# Altium PCB pcDuino Link Board.PcbDoc
Units mil, origin at the board's own origin, x right, y up, seen from the top; angles counter-clockwise.
Board outline 3664.37 x 2696.85 mil, 2 copper layers (Top Layer, Bottom Layer); 26 components, 52 nets, 135 pads, 1 vias.
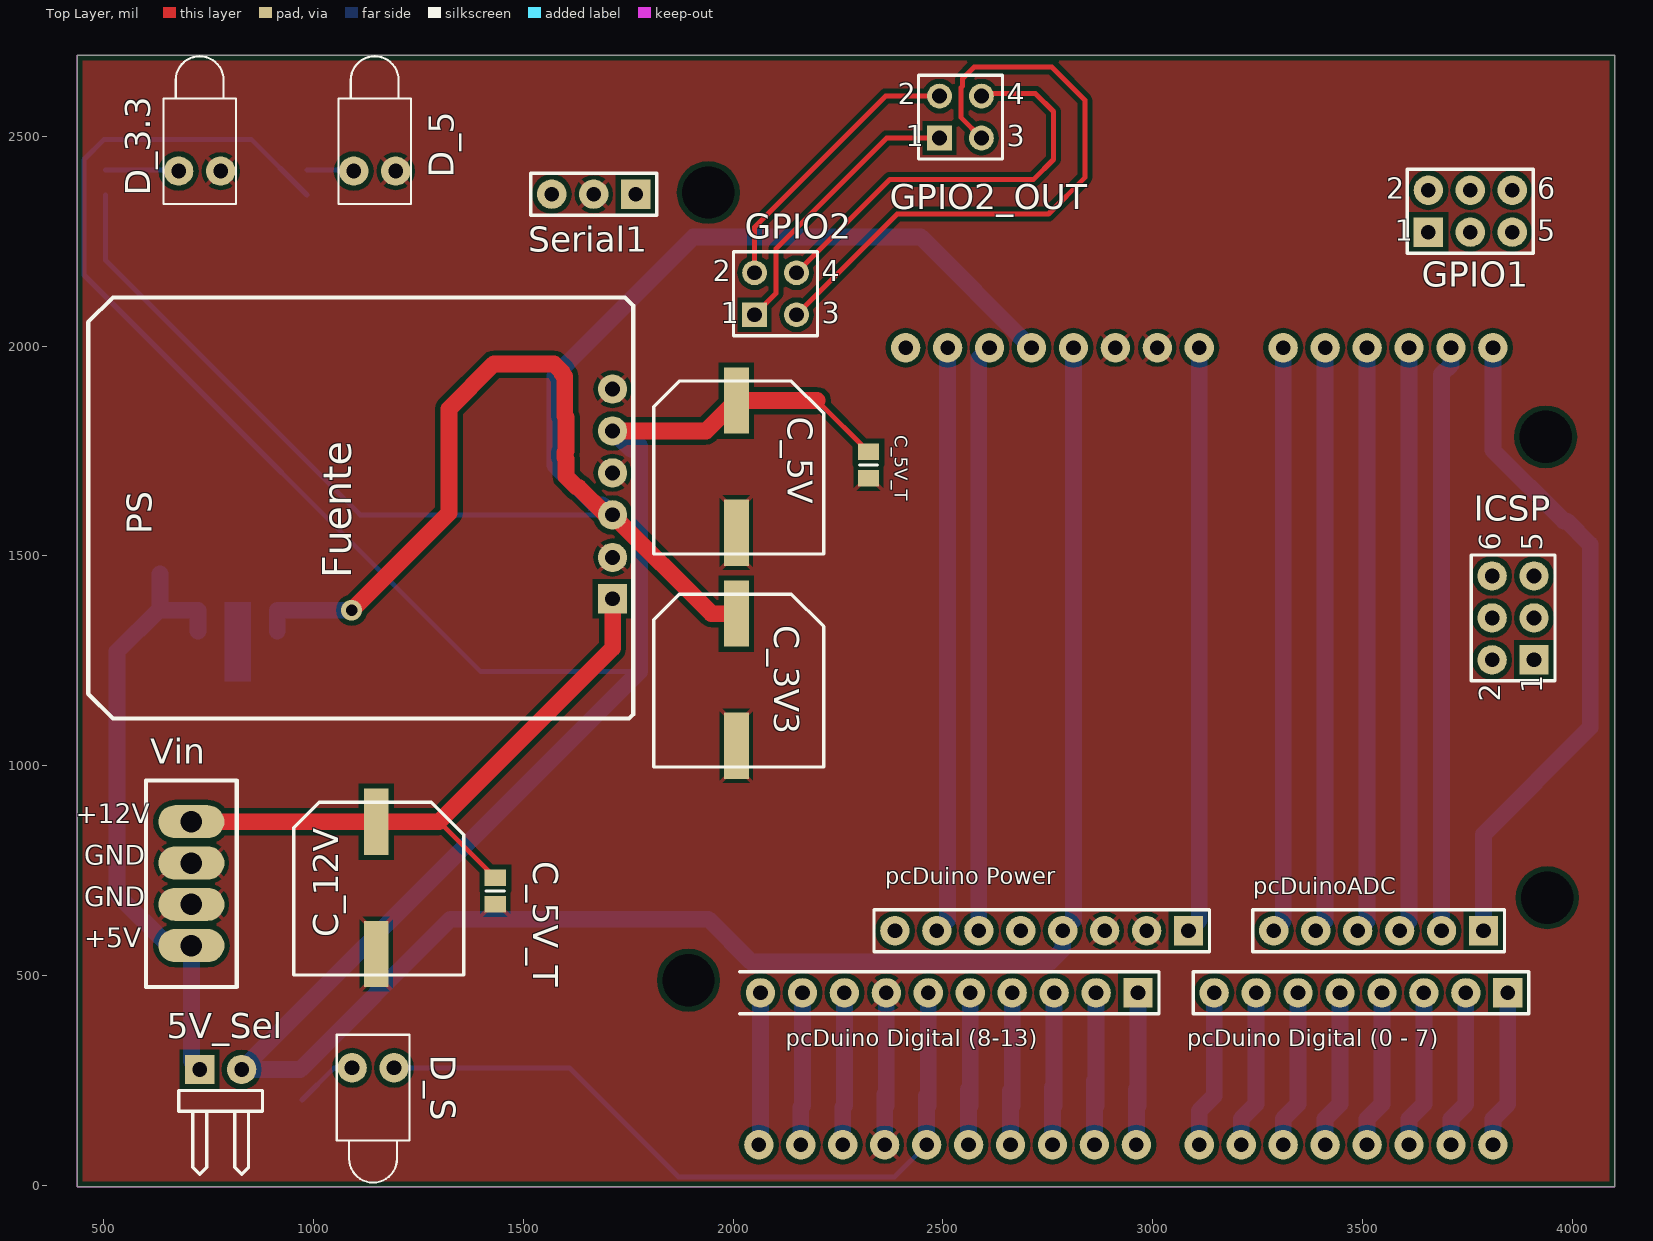
[diagram p0: Top Layer view]
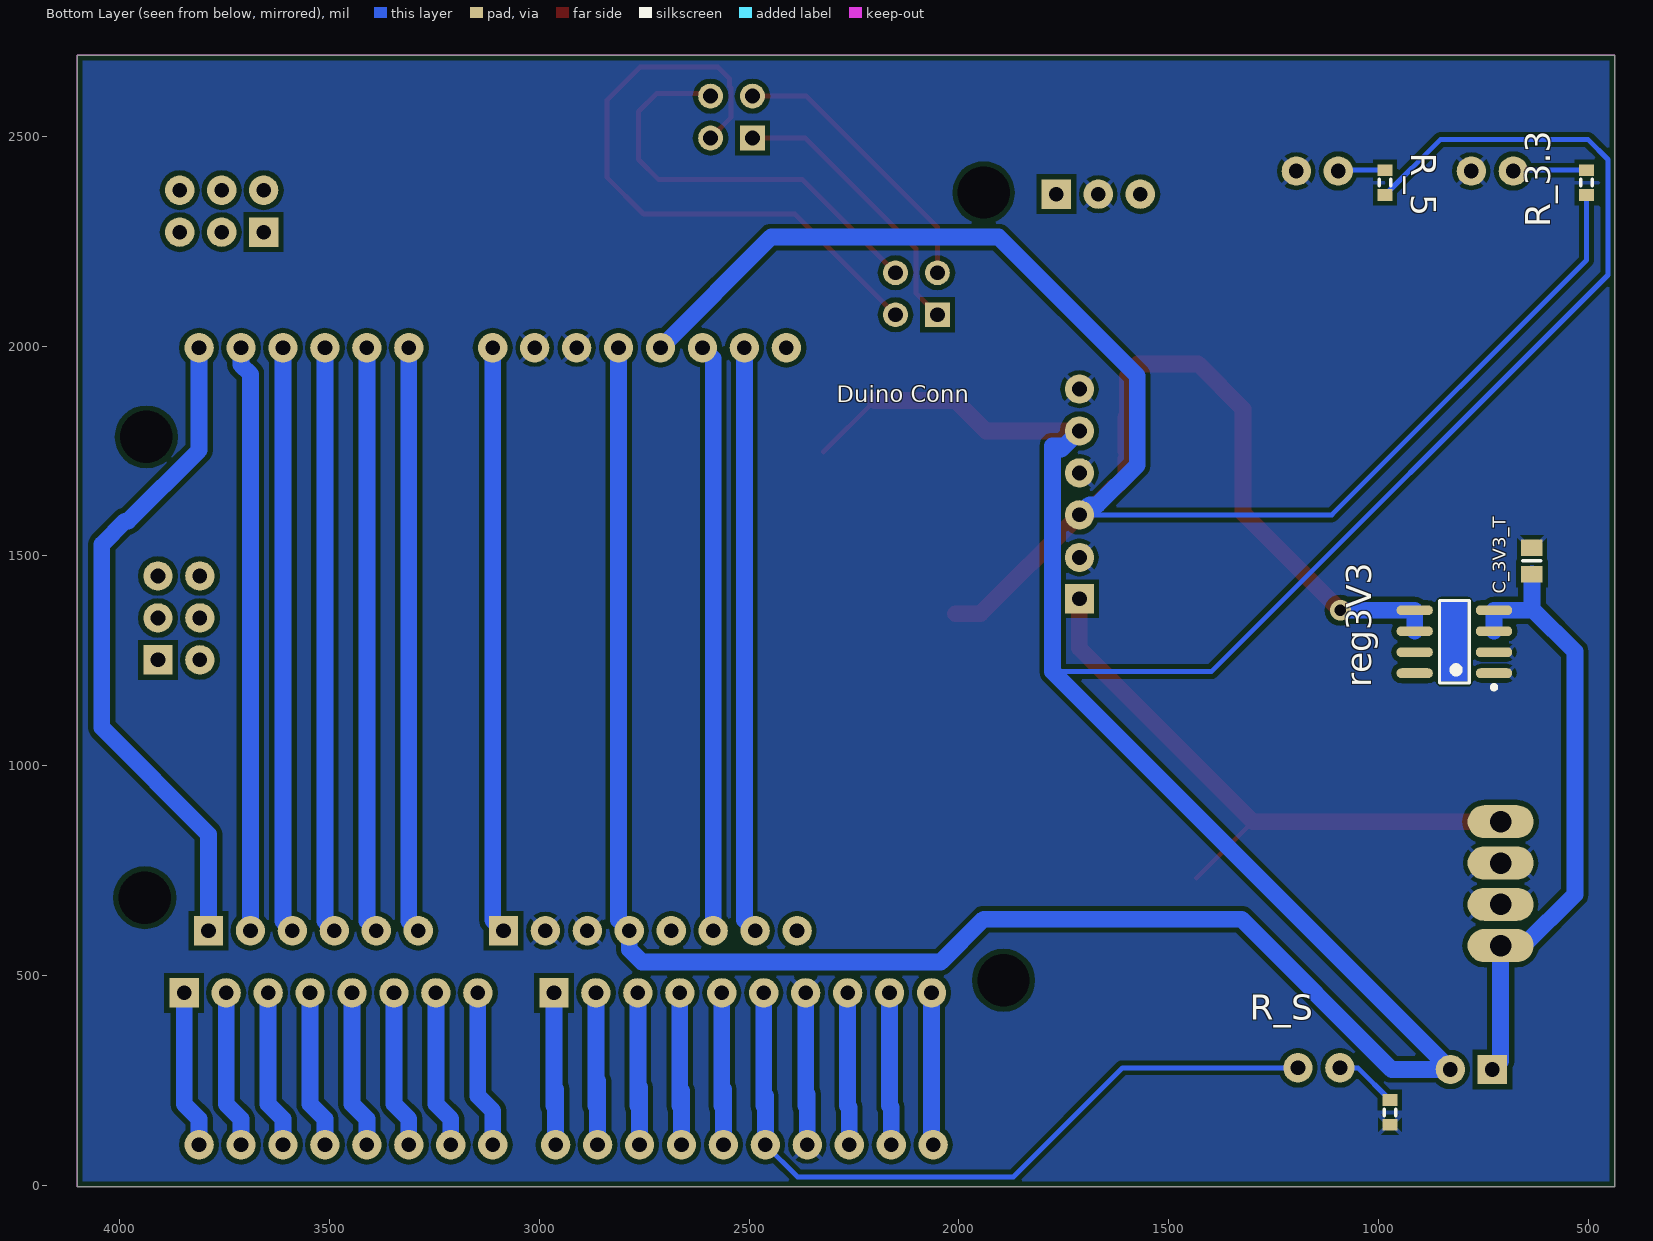
[diagram p1: Bottom Layer view, seen from below]

## Layer stack, top to bottom
Top Solder: solder mask 0.4, Solder Resist, Dk 3.5
Top Layer: signal copper 1.4
Dielectric 1: dielectric 12.6, FR-4, Dk 4.8
Bottom Layer: signal copper 1.4
Bottom Solder: solder mask 0.4, Solder Resist, Dk 3.5

## Board outline
437.01,-3.94 437.01,2692.91 4101.38,2692.91 4101.38,-3.94

## Design rules (kind name [scope] priority, off if disabled: settings)
Clearance Clearance_3 [All] p1: gap=12
ComponentClearance ComponentClearance_1 [All] p1: gap=10 collisioncheckmode=3 verticalgap=10 showdistances=FALSE
PlaneConnect [All] p1: planeconnectstyle=Relief reliefexpansion=20 reliefentries=2 reliefconductorwidth=10 reliefairgap=10
PolygonConnect [All] p1: connectstyle=Relief reliefconductorwidth=10 reliefentries=4 polygonreliefangle="45 Angle" airgapwidth=10
RoutingVias [All] p1: holewidth=28 width=50 viastyle="Through Hole" minholewidth=28 minwidth=50 maxholewidth=28 maxwidth=50
SolderMaskExpansion [All] p1: expansion=4
Width [All] p1: maxlimit=40 minlimit=10 preferedwidth=12
28 further rules are at their usual default settings.

## Classes and differential pairs
component class "pcDuino Link Board": D_S "Duino Conn" GPIO1 GPIO2 GPIO2_OUT ICSP "pcDuino Digital (0 - 7)" "pcDuino Digital (8-13)" "pcDuino Power" pcDuinoADC R_S Serial1
component class Power_In: 5V_Sel C_3V3 C_3V3_T C_5V C_5V_T C_12V D_3.3 D_5 PS R_3.3 R_5 reg3V3 Vin

## Components (designator, comment, footprint, x,y, rotation, side; value= is the part's Value field where it differs from the comment)
5V_Sel "Header 2H" HDR1X2H 728.35,275.59 r0 top
C_3V3 "Cap Pol1" "C Panasonic Size Cap Pol" 2007.87,1204.72 r270 top
C_3V3_T "Cap Pol1" 6-0805_L 633.86,1488.19 r90 bottom
C_5V "Cap Pol1" "C Panasonic Size Cap Pol" 2007.87,1712.6 r270 top
C_5V_T "Cap Pol1" 6-0805_L 1433.07,700.79 r270 top
C_5V_T "Cap Pol1" 6-0805_L 2322.83,1716.54 r270 top
C_12V "Cap Pol1" "C Panasonic Size Cap Pol" 1149.61,708.66 r270 top
D_3.3 "LED1" LED-1 728.35,2417.32 r90 top
D_5 "LED1" LED-1 1145.67,2417.32 r90 top
D_S "LED1" LED-1 1141.73,279.53 r270 top
"Duino Conn" "Shield form compatible with the Arduino Uno R3." UNO_R3_SHIELD 1661.42,-3.94 r90 bottom locked (schematic designator J?)
GPIO1 "Header 3X2" HDR2X3 3657.48,2271.65 r0 top locked
GPIO2 "Header 2X2" HDR2X2 2051.18,2074.8 r0 top
GPIO2_OUT "Header 2X2" HDR2X2 2492.13,2496.06 r0 top
ICSP "Header 3X2" HDR2X3 3909.45,1251.97 r90 top
"pcDuino Digital (0 - 7)" "Header 8" HDR1X8 3846.85,458.27 r180 top
"pcDuino Digital (8-13)" "Header 10" HDR1X10 2965.35,458.27 r180 top
"pcDuino Power" "Header 8" HDR1X8 3085.83,606.3 r180 top
pcDuinoADC "Header 6" HDR1X6 3788.98,606.3 r180 top
PS "Switching Power Source X-Sub" Fuente_Switching 1712.6,1397.64 r90 top
R_3.3 "Res" J1-0603 503.94,2389.76 r270 bottom
R_5 "Res" J1-0603 984.25,2389.76 r270 bottom
R_S "Res" J1-0603 972.44,173.23 r90 bottom
reg3V3 "TPS76833QD" TI-D8_N 818.9,1295.28 r0 bottom
Serial1 "Header 3" HDR1X3 1767.72,2362.2 r180 top
Vin "VCC_In" Vcc_In 708.66,866.14 r270 top

## Footprints (in the part's own frame and the unit in brackets; to place one, negate y for a bottom-side part, rotate by r counter-clockwise, add the part's x,y. Pads: shape width x height; smd on the part's side, far side on the other; paste and mask are expansions set on the pad)
6-0805_L [mm] "Chip Resistor, Body 2.0x1.2mm, IPC High Density"
  rect 1x1.3 smd: 1(-0.8,0) 2(0.8,0)
  silkscreen extent 0,-0.55 0,0.55, body extent -1.07,-0.7 1.07,0.7, height 0.7
"C Panasonic Size Cap Pol" [mm]
  rect 4x1.5 smd: 1(-4,0) 2(4,0)
  silkscreen extent -5.18,-5 5.28,5.28, body extent -5.09,-5.09 5.21,5.21, height 12.7
Fuente_Switching [mil]
  rect 70x70 hole 35: 1(0,0)
  round 70 hole 35: 2(98.43,0) 3(200,0) 4(300,0) 5(400,0) 6(500,0)
  silkscreen extent -285,-49 719,1250, body extent -289,-53 719,1248, height 59
HDR1X2H [mil] "Connector; Header; 2 Position; Right Angle"
  rect 70x70 hole 35: 1(0,0)
  round 70 hole 35: 2(100,0)
  silkscreen extent -50,-250 150,-50
HDR1X3 [mil] "Connector; Header; 3 Position"
  rect 70x70 hole 35: 1(0,0)
  round 70 hole 35: 2(100,0) 3(200,0)
  silkscreen extent -50,-50 250,50
HDR1X6 [mil] "Connector; Header; 6 Position"
  rect 70x70 hole 35: 1(0,0)
  round 70 hole 35: 2(100,0) 3(200,0) 4(300,0) 5(400,0) 6(500,0)
  silkscreen extent -50,-50 550,50
HDR1X8 [mil] "Connector; Header; 8 Position"
  rect 70x70 hole 35: 1(0,0)
  round 70 hole 35: 2(100,0) 3(200,0) 4(300,0) 5(400,0) 6(500,0) 7(600,0) 8(700,0)
  silkscreen extent -50,-50 750,50
HDR1X10 [mil] "Connector; Header; 10 Position"
  rect 70x70 hole 35: 1(0,0)
  round 70 hole 35: 2(100,0) 3(200,0) 4(300,0) 5(400,0) 6(500,0) 7(600,0) 8(700,0) 9(800,0) 10(900,0)
  silkscreen extent -50,-50 950,50
HDR2X2 [mm] "Connector; Header; 2x2 Position"
  rect 1.5x1.5 hole 0.9: 1(0,0)
  round 1.5 hole 0.9: 2(0,2.54) 3(2.54,0) 4(2.54,2.54)
  silkscreen extent -1.27,-1.27 3.81,3.81
HDR2X3 [mil] "Connector; Header; 3x2 Position"
  rect 70x70 hole 35: 1(0,0)
  round 70 hole 35: 2(0,100) 3(100,0) 4(100,100) 5(200,0) 6(200,100)
  silkscreen extent -50,-50 250,150
J1-0603 [mm] "Chip Resistor, Body 1.6x0.8mm, IPC High Density"
  rect 0.7x0.9 smd: 1(-0.75,0) 2(0.75,0)
  silkscreen extent -0.2,-0.35 0.2,0.35, body extent -0.85,-0.48 0.85,0.48, height 0.9
LED-1 [mil] "LED; 2 Leads"
  round 70 hole 35: 1(0,50) 2(0,-50)
  silkscreen extent -79,-87 274,87
TI-D8_N [mm] "SOIC, 8-Leads, Body 4.9x3.9mm, Pitch 1.27mm, IPC Medium Density"
  oval 2.2x0.6 smd: 1(-2.4,1.905) 2(-2.4,0.635) 3(-2.4,-0.635) 4(-2.4,-1.905) 5(2.4,-1.905) 6(2.4,-0.635) 7(2.4,0.635) 8(2.4,1.905)
  silkscreen extent -2.52,-2.5 0.9,2.88, body extent -2,-2.5 2,2.5, height 1.75
UNO_R3_SHIELD [mil]
  round 70 hole 35: 3.3V(2000,1050) 5V(2000,1150) A0(2000,1650) A1(2000,1750) A2(2000,1850) A3(2000,1950) A4(2000,2050) A5(2000,2150) AREF(100,600) D2(100,1950) D3(100,1850) D4(100,1750) D5(100,1650) D6(100,1550) D7(100,1450) D8(100,1300) D9(100,1200) D10(100,1100) D11(100,1000) D12(100,900) D13(100,800) GND@0(2000,1250) GND@1(2000,1350) GND@2(100,700) IOREF(2000,850) NC(2000,750) RES(2000,950) RX(100,2150) SCL(100,400) SDA(100,500) TX(100,2050) VIN(2000,1450)
Vcc_In [mm]
  oval 2x4 hole 1.3: 0(0,0) 1(2.5,0) 2(5,0) 3(7.5,0)
  silkscreen extent -2.5,-2.75 10,2.75

## Part data
5V_Sel: "Header, 2-Pin, Right Angle"
C_3V3 C_5V C_12V: "Polarized Capacitor (Radial)"
C_3V3_T C_5V_T C_5V_T: "Tantalum"
D_3.3 D_5 D_S: "Typical RED GaAs LED"
"Duino Conn": library part ARDUINO_R3_SHIELDNOLABELS
GPIO1 ICSP: "Header, 3-Pin, Dual row"
GPIO2 GPIO2_OUT: "Header, 2-Pin, Dual row"
"pcDuino Digital (0 - 7)" "pcDuino Power": "Header, 8-Pin"
"pcDuino Digital (8-13)": "Header, 10-Pin"
pcDuinoADC: "Header, 6-Pin"
R_3.3 R_5 R_S: library part Res3, "Resistor"
reg3V3: "Single Output Fast Transient Response LDO, 1 A, Fixed 3.3 V Output, 2.7 to 10 V Input, with Low IQ, 8-pin SOIC (D), -40 to 125 degC, Green (RoHS & no Sb/Br)"
Serial1: "Header, 3-Pin"

## Free pads (board coordinates)
  round 70 hole 125: 7(1893.7,488.19) 8(3940.94,685.04) 9(3937.01,1783.46) 10(1940.94,2366.14)

## Via types
v1: diameter 50, hole 28, Top Layer to Bottom Layer, 1 vias

## Nets (pads, with @x,y where several pads share a name; then routed paths per layer and width w, separated by ;. In a path a pad name is that pad's centre, name@x,y a point inside that pad or via, vN(x,y) a via of type N, cw(c..) or ccw(c..) an arc to the next point about the centre after c; other vN are vias at no path point)
+3.3V: "Duino Conn.3.3V" C_3V3.1 PS.3 R_3.3.2 reg3V3.5 reg3V3.6 | length 5305.1
  Top Layer w40: v1(1090.75,1370.28) 1322.83,1602.36 1322.83,1850.63 1429.27,1957.06 1573.37,1957.06 1592.12,1938.31 1592.12,1934.07 1598.96,1927.23 1598.96,1832.97 1601.96,1829.97 1601.96,1749.91 1598.96,1746.91 1598.96,1734.62 1601.96,1731.62 1601.96,1689.38 1627.95,1663.39 1631.89,1663.39 PS.3@1697.64,1597.64 ; PS.3 1948.03,1362.2 C_3V3.1
  Bottom Layer w12: R_3.3.2 503.94,2204.72 1111.02,1597.64 PS.3
  Bottom Layer w40: reg3V3.6 reg3V3.5 v1(1090.75,1370.28) ; PS.3 1688.19,1622.05 1669.29,1622.05 1574.8,1716.54 1574.8,1929.13 1905.51,2259.84 2447.64,2259.84 2711.42,1996.06
+5V: 5V_Sel.2 "Duino Conn.5V" "pcDuino Power.4" C_5V.1 C_5V_T.1@2322.83,1748.03 PS.5 R_5.2 | length 8825.3
  Top Layer w12: 2200.79,1870.08 C_5V_T.1@2322.83,1748.03
  Top Layer w40: PS.5 1935.43,1797.64 C_5V.1 2200.79,1870.08
  Bottom Layer w12: R_5.2 852.36,2492.13 500,2492.13 452.76,2444.88 452.76,2169.29 1398.2,1223.84 1776.6,1223.84
  Bottom Layer w40: PS.5 1755.91,1754.33 1755.91,1761.64 1776.6,1761.64 1776.6,1223.84 5V_Sel.2 968.22,275.59 1326.49,633.86 1940.94,633.86 2043.31,531.5 2755.91,531.5 2785.83,561.42 2785.83,606.3 ; 2811.42,631.89 2811.42,1996.06
+5V_OP: 5V_Sel.1 C_3V3_T.1 reg3V3.3 reg3V3.4 Vin.3 | length 1448.5
  Bottom Layer w25: Vin.3@653.54,570.87 Vin.3
  Bottom Layer w40: 633.86,1374.02 C_3V3_T.1 ; Vin.3@653.54,570.87 531.5,692.91 531.5,1271.65 630.12,1370.28 reg3V3.4 reg3V3.3 ; 5V_Sel.1@708.66,295.27 Vin.3
+12V: C_5V_T.1@1433.07,732.28 C_12V.1 PS.1 Vin.0 | length 1482.6
  Top Layer w12: 1299.21,866.14 C_5V_T.1@1433.07,732.28
  Top Layer w39.37: Vin.0 1299.21,866.14 1712.6,1279.53 PS.1
AD1: "Duino Conn.A5" pcDuinoADC.1 | length 1595.8
  Bottom Layer w40: pcDuinoADC.1 3788.98,836.22 4043.31,1090.55 4043.31,1527.56 3988.19,1582.68 3980.32,1582.68 3811.42,1751.57 3811.42,1996.06
AD2: "Duino Conn.A4" pcDuinoADC.2 | length 1399.1
  Bottom Layer w40: pcDuinoADC.2 3688.98,1933.07 3711.42,1955.51 3711.42,1996.06
AD3: "Duino Conn.A3" pcDuinoADC.3 | length 1399.1
  Bottom Layer w40: pcDuinoADC.3 3611.42,628.74 3611.42,1996.06
AD4: "Duino Conn.A2" pcDuinoADC.4 | length 1399.1
  Bottom Layer w40: pcDuinoADC.4 3511.42,628.74 3511.42,1996.06
AD5: "Duino Conn.A1" pcDuinoADC.5 | length 1399.1
  Bottom Layer w12: pcDuinoADC.5 pcDuinoADC.5@3411.42,628.74
  Bottom Layer w40: pcDuinoADC.5@3411.42,628.74 3411.42,1996.06
AD6: "Duino Conn.A0" pcDuinoADC.6 | length 1399.1
  Bottom Layer w40: pcDuinoADC.6 3311.42,628.74 3311.42,1996.06
GND: "Duino Conn.GND@0" "Duino Conn.GND@1" "Duino Conn.GND@2" "pcDuino Digital (8-13).7" "pcDuino Power.2" "pcDuino Power.3" C_3V3.2 C_3V3_T.2 C_5V.2 C_5V_T.2 C_12V.2 D_3.3.2 D_5.2 PS.2 PS.4 PS.6 R_S.1 reg3V3.1 reg3V3.2 Serial1.2 Vin.1 Vin.2 | length 389.8
  Bottom Layer w40: 2361.42,96.06 2361.42,216.53 ; 2365.36,188.98 2365.36,458.27
GPIO_1_1: GPIO1.1
GPIO_1_2: GPIO1.2
GPIO_1_3: GPIO1.3
GPIO_1_4: GPIO1.4
GPIO_1_5: GPIO1.5
GPIO_1_6: GPIO1.6
GPIO_2_1: GPIO2.1 GPIO2_OUT.1 | length 677.7
  Top Layer w12: GPIO2.1 2102.36,2125.98 2102.36,2232.28 2366.14,2496.06 GPIO2_OUT.1
GPIO_2_2: GPIO2.2 GPIO2_OUT.2 | length 679.1
  Top Layer w12: GPIO2.2 2051.18,2283.46 2363.78,2596.06 GPIO2_OUT.2
GPIO_2_3: GPIO2.3 GPIO2_OUT.3 | length 1506.4
  Top Layer w12: GPIO2.3 2391.34,2314.96 2751.97,2314.96 2838.58,2401.57 2838.58,2586.61 2759.84,2665.35 2574.8,2665.35 2547.24,2637.8 2547.24,2619.59 2543.76,2616.1 2543.76,2544.43 GPIO2_OUT.3
GPIO_2_4: GPIO2.4 GPIO2_OUT.4 | length 1030.8
  Top Layer w12: GPIO2.4 2374.02,2397.64 2716.54,2397.64 2763.78,2444.88 2763.78,2559.06 2720.47,2602.36 2598.43,2602.36 GPIO2_OUT.4
ICSP_1: ICSP.1
ICSP_2: ICSP.2
ICSP_3: ICSP.3
ICSP_4: ICSP.4
ICSP_5: ICSP.5
ICSP_6: ICSP.6
LED_STATUS: "Duino Conn.D13" "pcDuino Digital (8-13).6" D_S.1 | length 1794.8
  Bottom Layer w12: D_S.1 1610.24,279.53 1870.08,19.69 2385.04,19.69 2461.42,96.06
  Bottom Layer w40: 2461.42,96.06 2461.42,212.6 ; 2465.36,188.98 2465.36,458.27
NetD_3.3_1: D_3.3.1 R_3.3.1 | length 172.4
  Bottom Layer w12: R_3.3.1 D_3.3.1@676.38,2419.29
NetD_5_1: D_5.1 R_5.1 | length 109.4
  Bottom Layer w12: R_5.1 D_5.1@1093.7,2419.29
NetD_S_2: D_S.2 R_S.2 | length 151.1
  Bottom Layer w12: R_S.2 1049.21,279.53 D_S.2
"NetDuino Conn_AREF": "Duino Conn.AREF" "pcDuino Digital (8-13).8" | length 358.3
  Bottom Layer w40: 2261.42,96.06 2261.42,185.04 ; 2265.36,188.98 2265.36,458.27
"NetDuino Conn_D2": "Duino Conn.D2" "pcDuino Digital (0 - 7).3" | length 376.9
  Bottom Layer w40: 3611.42,96.06 3611.42,157.48 3646.85,192.91 3646.85,458.27
"NetDuino Conn_D3": "Duino Conn.D3" "pcDuino Digital (0 - 7).4" | length 376.9
  Bottom Layer w40: 3511.42,96.06 3511.42,157.48 3546.85,192.91 3546.85,458.27
"NetDuino Conn_D4": "Duino Conn.D4" "pcDuino Digital (0 - 7).5" | length 376.9
  Bottom Layer w40: 3411.42,96.06 3411.42,157.48 3446.85,192.91 3446.85,458.27
"NetDuino Conn_D5": "Duino Conn.D5" "pcDuino Digital (0 - 7).6" | length 376.9
  Bottom Layer w40: 3311.42,96.06 3311.42,157.48 3346.85,192.91 3346.85,458.27
"NetDuino Conn_D6": "Duino Conn.D6" "pcDuino Digital (0 - 7).7" | length 376.9
  Bottom Layer w40: 3211.42,96.06 3211.42,157.48 3246.85,192.91 3246.85,458.27
"NetDuino Conn_D7": "Duino Conn.D7" "pcDuino Digital (0 - 7).8" | length 376.9
  Bottom Layer w40: 3111.42,96.06 3111.42,177.16 3146.85,212.6 3146.85,458.27
"NetDuino Conn_D8": "Duino Conn.D8" "pcDuino Digital (8-13).1" | length 401.6
  Bottom Layer w40: 2961.42,96.06 2961.42,228.35 ; 2965.36,188.98 2965.36,458.27
"NetDuino Conn_D9": "Duino Conn.D9" "pcDuino Digital (8-13).2" | length 421.3
  Bottom Layer w40: 2861.42,96.06 2861.42,248.03 ; 2865.36,188.98 2865.36,458.27
"NetDuino Conn_D10": "Duino Conn.D10" "pcDuino Digital (8-13).3" | length 405.5
  Bottom Layer w40: 2761.42,96.06 2761.42,232.28 ; 2765.36,188.98 2765.36,458.27
"NetDuino Conn_D11": "Duino Conn.D11" "pcDuino Digital (8-13).4" | length 397.6
  Bottom Layer w40: 2661.42,96.06 2661.42,224.41 ; 2665.36,188.98 2665.36,458.27
"NetDuino Conn_D12": "Duino Conn.D12" "pcDuino Digital (8-13).5" | length 401.6
  Bottom Layer w40: 2561.42,96.06 2561.42,228.35 ; 2565.36,188.98 2565.36,458.27
"NetDuino Conn_IOREF": "Duino Conn.IOREF" "pcDuino Power.7" | length 1400.4
  Bottom Layer w40: 2485.83,606.3 2511.42,631.89 2511.42,1996.06
"NetDuino Conn_RES": "Duino Conn.RES" "pcDuino Power.6" | length 1400.4
  Bottom Layer w40: 2585.83,606.3 2585.83,1970.47 2611.42,1996.06
"NetDuino Conn_RX": "Duino Conn.RX" "pcDuino Digital (0 - 7).1" | length 376.9
  Bottom Layer w40: 3811.42,96.06 3811.42,157.48 3846.85,192.91 3846.85,458.27
"NetDuino Conn_TX": "Duino Conn.TX" "pcDuino Digital (0 - 7).2" | length 376.9
  Bottom Layer w40: 3711.42,96.06 3711.42,157.48 3746.85,192.91 3746.85,458.27
"NetDuino Conn_VIN": "Duino Conn.VIN" "pcDuino Power.1" | length 1400.4
  Bottom Layer w40: 3085.83,606.3 3111.42,631.89 3111.42,1996.06
RX: Serial1.3
SCL_PCDUINO: "Duino Conn.SCL" "pcDuino Digital (8-13).10" | length 358.3
  Bottom Layer w40: 2065.36,100 2065.36,458.27
SDA_PCDUINO: "Duino Conn.SDA" "pcDuino Digital (8-13).9" | length 358.3
  Bottom Layer w40: 2161.42,96.06 2161.42,185.04 ; 2165.36,188.98 2165.36,458.27
TX: Serial1.1
pads on no net: "Duino Conn.NC" "pcDuino Power.5" "pcDuino Power.8" reg3V3.7 reg3V3.8

## Polygon pours and split planes (outlines as drawn)
GND on Top Layer "gnd mask" (solid, pour order 2): 437.01,2692.91 437.01,-3.94 4101.38,-3.94 4101.38,2692.91
GND on Bottom Layer "gnd mask" (solid, pour order 4): 437.01,2692.91 437.01,-3.94 4101.38,-3.94 4101.38,2692.91

## Keep-outs
Keep-Out Layer:
  lines w1: 4101.38,-3.94 437.01,-3.94 437.01,2692.91 4101.38,2692.91 4101.38,-3.94 ; 4101.38,-3.94 4101.38,-3.94

## Other copper
Top Layer:
  rectangle: 4101.38,-3.94 4101.38,2692.91
  rectangle: 437.01,-3.94 437.01,2692.91
Bottom Layer:
  rectangle net GND: 787.4,1200.79 850.39,1389.76

## Text inside footprints (layer, text, board x,y; h text height)
"Duino Conn": Mechanical 16 "ISP" at 3851.42,976.06 h17 r270; Mechanical 16 "RST" at 3726.42,1071.06 h17 r270
GPIO1: Top Overlay "6" at 3917.48,2351.65 h50; Top Overlay "5" at 3917.48,2251.65 h50; Top Overlay "2" at 3557.48,2351.65 h50; Top Overlay "1" at 3577.48,2251.65 h50
GPIO2: Top Overlay "1" at 1971.18,2054.8 h50; Top Overlay "2" at 1951.18,2154.8 h50; Top Overlay "4" at 2211.18,2154.8 h50; Top Overlay "3" at 2211.18,2054.8 h50
GPIO2_OUT: Top Overlay "1" at 2412.13,2476.06 h50; Top Overlay "2" at 2392.13,2576.06 h50; Top Overlay "4" at 2652.13,2576.06 h50; Top Overlay "3" at 2652.13,2476.06 h50
ICSP: Top Overlay "6" at 3829.45,1511.97 h50 r90; Top Overlay "5" at 3929.45,1511.97 h50 r90; Top Overlay "2" at 3829.45,1151.97 h50 r90; Top Overlay "1" at 3929.45,1171.97 h50 r90
PS: Top Overlay "Fuente" at 1112.2,1446.85 h118.11 r90
Vin: Top Overlay "+5V" at 452.76,551.18 h78.74; Top Overlay "+12V" at 433.07,846.46 h78.74; Top Overlay "GND" at 452.76,748.03 h78.74; Top Overlay "GND" at 452.76,649.61 h78.74